# Altium PCB BrewBitTC.PcbDoc
Units mil, origin at the board's own origin, x right, y up, seen from the top; angles counter-clockwise.
Board outline 2381.89 x 3216.54 mil, 2 copper layers (Top Layer, Bottom Layer); 47 components, 88 nets, 272 pads, 186 vias.
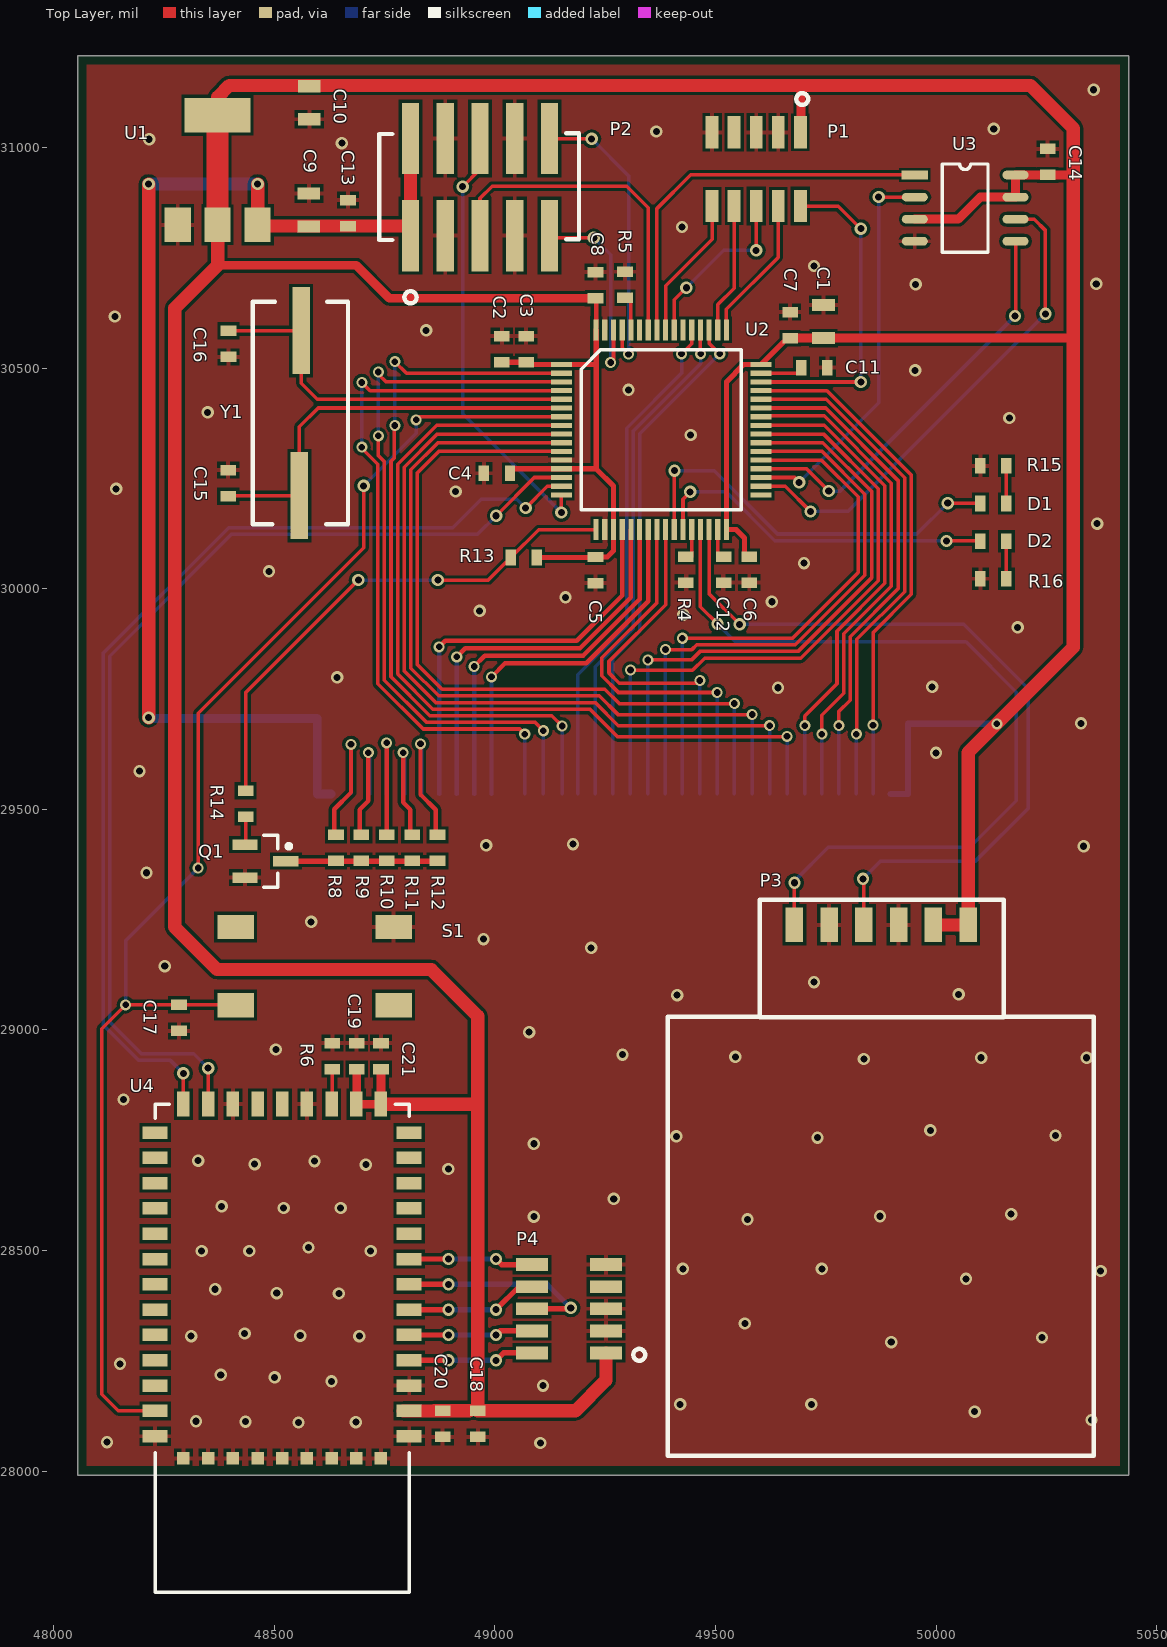
[diagram p0: Top Layer view]
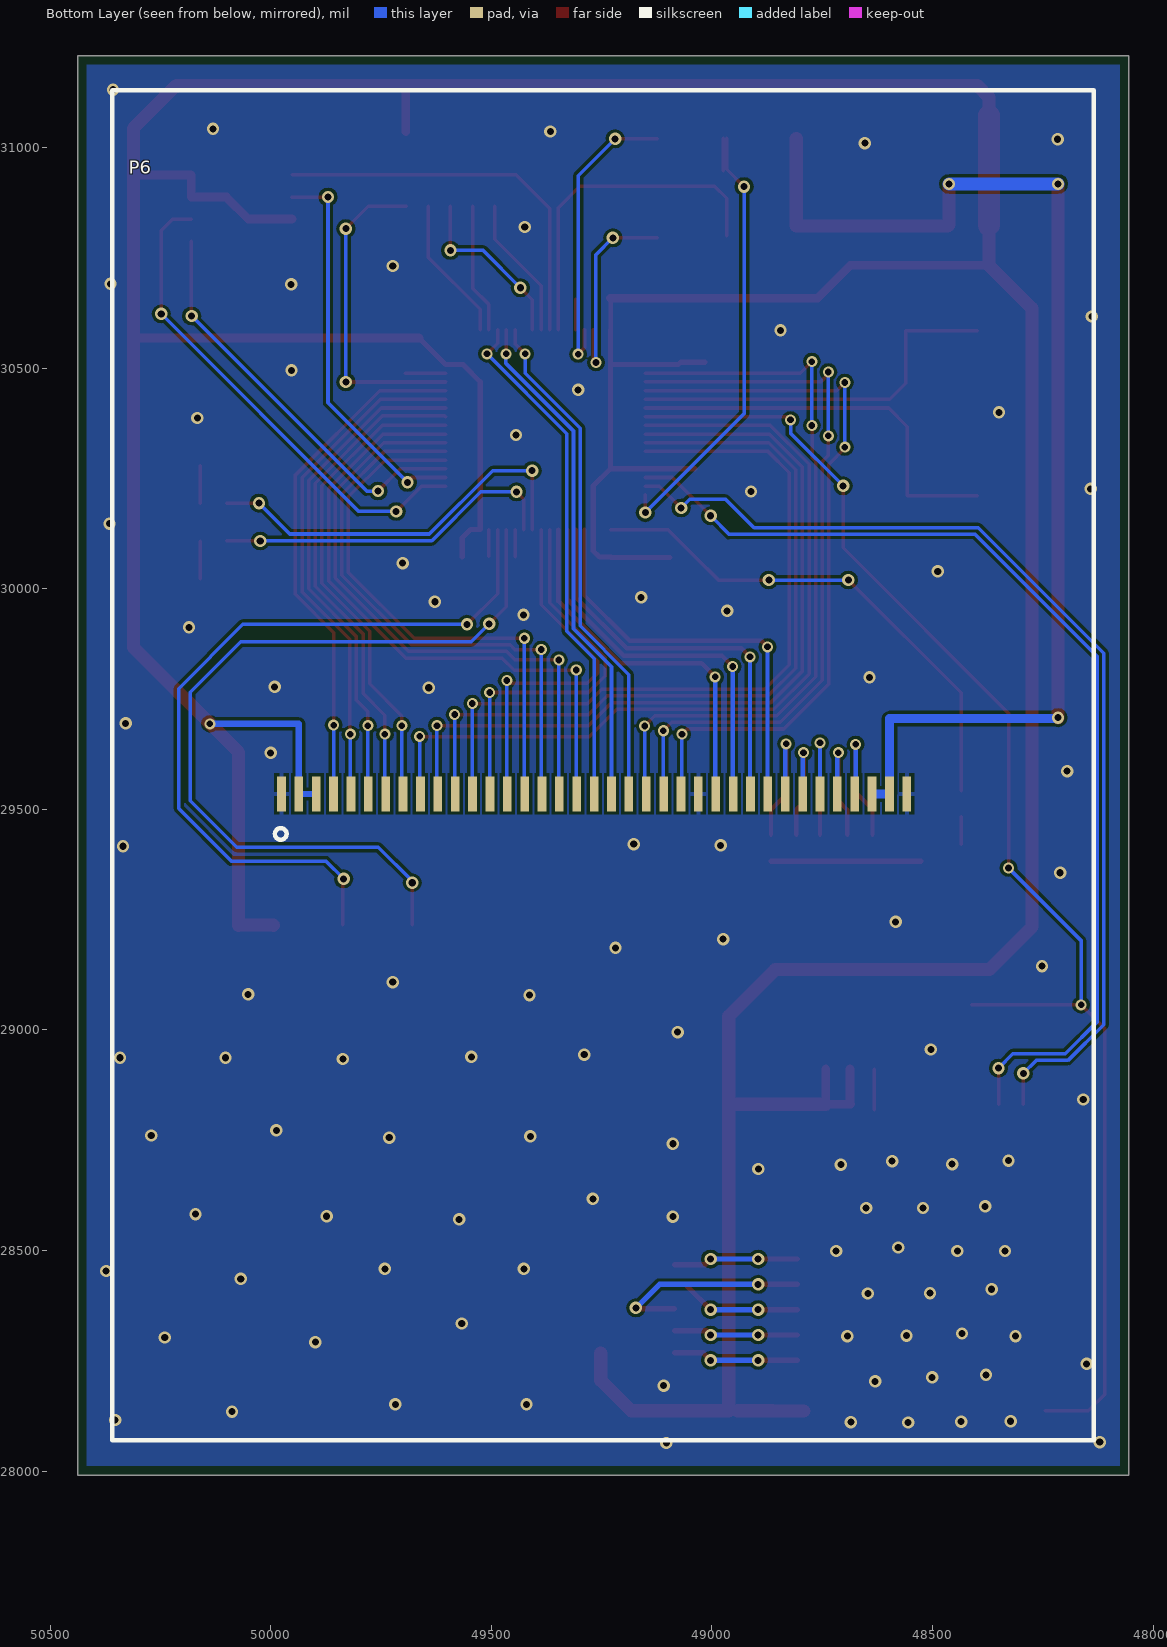
[diagram p1: Bottom Layer view, seen from below]

## Layer stack, top to bottom
Top Layer: signal copper 1.4
Dielectric: dielectric 12.6, FR-4, Dk 4.8
Bottom Layer: signal copper 1.4

## Board outline
48055.12,27991.14 48055.12,31207.68 50437.01,31207.68 50437.01,27991.14

## Design rules (kind name [scope] priority, off if disabled: settings)
Clearance [All] p1: gap=7
HoleSize [All] p1: absolutevalues=TRUE maxlimit=250 minlimit=15 maxpercent=80.000 minpercent=20.000
MinimumAnnularRing [All] p1: minimumring=5
MinimumSolderMaskSliver FinePitchQFP [InComponent('U2') vs InComponent('U2')] p1: minsoldermaskwidth=0
MinimumSolderMaskSliver [All] p2: minsoldermaskwidth=10
PolygonConnect ViaConnect [IsVia] p1: connectstyle=Direct reliefconductorwidth=10 reliefentries=4 polygonreliefangle="90 Angle"
PolygonConnect [All] p2: connectstyle=Relief reliefconductorwidth=10 reliefentries=4 polygonreliefangle="90 Angle"
RoutingVias [All] p1: holewidth=10 width=22 viastyle="Through Hole" minholewidth=10 minwidth=22 maxholewidth=28 maxwidth=50
SilkscreenOverComponentPads [All] p1: minsilkscreentomaskgap=10
SolderMaskExpansion [All] p1: expansion=4
Width [All] p1: maxlimit=50 minlimit=8 preferedwidth=10
25 further rules are at their usual default settings.

## Classes and differential pairs
component class LCD: P6 Q1 R8 R9 R10 R11 R12 R13 R14
component class ISM4319: C18 C19 C20 C21 P4 R6 U4
component class BrewBitTC: C1 C2 C3 C4 C5 C6 C7 C8 C9 C10 C11 C12 C13 C14 C15 C16 C17 D1 D2 P1 P2 P3 R4 R5 R15 R16 S1 U1 U2 U3 Y1

## Components (designator, comment, footprint, x,y, rotation, side; value= is the part's Value field where it differs from the comment)
C1 "Cap" 0805 49745.08,30605.31 r270 top
C2 "Cap" 0603 49015.98,30543.03 r270 top
C3 "Cap" 0603 49070.98,30543.03 r270 top
C4 "Cap" 0603 49004.92,30261.81 r0 top
C5 "Cap" 0603 49228.35,30042.32 r90 top
C6 "Cap" 0603 49576.77,30043.31 r90 top
C7 "Cap" 0603 49669.29,30597.44 r270 top
C8 "Cap" 0603 49228.35,30687.99 r270 top
C9 "Cap" 0805 48578.74,30858.27 r270 top
C10 "Cap" 0805 48579.72,31101.38 r90 top
C11 "Cap" 0603 49724.41,30500.98 r180 top
C12 "Cap" 0603 49518.7,30043.31 r90 top
C13 "Cap" 0603 48667.32,30851.38 r270 top
C14 "Cap" 0603 50252.95,30967.52 r270 top
C15 "Cap" 0603 48395.67,30239.17 r270 top
C16 "Cap" 0603 48396.65,30555.12 r90 top
C17 "Cap" 0603 48284.45,29027.56 r90 top
C18 "Cap" 0603 48961.61,28107.28 r90 top
C19 "Cap" 0603 48687.01,28940.75 r270 top
C20 "Cap" 0603 48881.89,28107.28 r90 top
C21 "Cap" 0603 48742.01,28940.75 r270 top
D1 "LED2" 0603 50129.92,30193.24 r0 top
D2 "LED2" 0603 50129.92,30107.94 r0 top
P1 "MCU JTAG" "5X2 PIN SMT HEADER" 49592.52,31034.45 r270 top
P2 "PWR_BRD" "5X2 PIN SMT HEADER - 2.0MM" 48809.06,30800.2 r90 top
P3 "BB-WS-DB" "6 Pin SMT Header - duplicate" 49679.13,29238.19 r0 top
P4 "ISM JTAG" "5X2 PIN SMT HEADER" 49251.97,28368.11 r180 top
P6 "ER-TFT032-2" ER-TFT032-2 49246.46,29599.84 r180 bottom locked
Q1 "NPN" SOT23_M 48480.2,29382.68 r0 top
R4 "Res2" 0603 49433.07,30043.31 r90 top
R5 "Res2" 0603 49295.28,30688.98 r270 top
R6 "Res2" 0603 48632.01,28940.75 r90 top
R8 "Res2" 0603 48640.08,29412.68 r90 top
R9 "Res2" 0603 48697.58,29412.68 r90 top
R10 "Res2" 0603 48755.08,29412.68 r90 top
R11 "Res2" 0603 48812.58,29412.68 r90 top
R12 "Res2" 0603 48870.08,29412.68 r90 top
R13 "Res2" 0603 49065.94,30070.87 r0 top
R14 "Res2" 0603 48435.2,29512.68 r90 top
R15 "Res2" 0603 50129.92,30278.54 r0 top
R16 "Res2" 0603 50129.92,30022.64 r0 top
S1 "SW-PB" FSM4JSMA 48591.54,29144.69 r270 top
U1 "NCP1117LP" SOT-223 48372.05,30824.8 r0 top
U2 "STM32F205" LQFP64 49150.98,30508.03 r0 top
U3 "M25P80-VMN6TP" SO8N 49951.86,30937.6 r0 top
U4 "ISM43xx" ISM-WIFI 48792.01,28079.25 r180 top
Y1 "XTAL" "HC49SD XTAL" 48560.98,30398.03 r270 top

## Footprints (in the part's own frame and the unit in brackets; to place one, negate y for a bottom-side part, rotate by r counter-clockwise, add the part's x,y. Pads: shape width x height; smd on the part's side, far side on the other; paste and mask are expansions set on the pad)
"5X2 PIN SMT HEADER" [mm]
  rect 1.85x0.74 smd: 1(0,2.54) 2(4.25,2.54) 3(0,1.27) 4(4.25,1.27) 5(0,0) 6(4.25,0) 7(0,-1.27) 8(4.25,-1.27) 9(0,-2.54) 10(4.25,-2.54)
  silkscreen extent -2.26,2.31 -1.58,2.99
"5X2 PIN SMT HEADER - 2.0MM" [mm]
  rect 4.1x1 smd: 1(0,0) 2(5.6,0) 3(0,-2) 4(5.6,-2) 5(0,-4) 6(5.6,-4) 7(0,-6) 8(5.6,-6) 9(0,-8) 10(5.6,-8)
  silkscreen extent -3.9,-9.7 5.9,1.8
"6 Pin SMT Header - duplicate" [mm] "For 3M9355TR-ND"
  rect 1x2 smd: 1(0,0) 2(2,0) 3(4,0) 4(6,0) 5(8,0) 6(10,0)
  silkscreen extent -2,-5.31 12.05,1.45
0603 [mm]
  rect 0.6x0.9 smd: 1(-0.75,0) 2(0.75,0)
0805 [mm]
  rect 0.7x1.3 smd: 1(-0.95,0) 2(0.95,0)
ER-TFT032-2 [mm] "East Rising 3.2\" TFT LCD"
  rect 0.5x2 smd: 1(-18.52,-1.65) 2(-17.52,-1.65) 3(-16.52,-1.65) 4(-15.52,-1.65) 5(-14.52,-1.65) 6(-13.52,-1.65) 7(-12.52,-1.65) 8(-11.52,-1.65) 9(-10.52,-1.65) 10(-9.52,-1.65) 11(-8.52,-1.65) 12(-7.52,-1.65) 13(-6.52,-1.65) 14(-5.52,-1.65) 15(-4.52,-1.65) 16(-3.52,-1.65) 17(-2.52,-1.65) 18(-1.52,-1.65) 19(-0.52,-1.65) 20(0.48,-1.65) 21(1.48,-1.65) 22(2.48,-1.65) 23(3.48,-1.65) 24(4.48,-1.65) 25(5.48,-1.65) 26(6.48,-1.65) 27(7.48,-1.65) 28(8.48,-1.65) 29(9.48,-1.65) 30(10.48,-1.65) 31(11.48,-1.65) 32(12.48,-1.65) 33(13.48,-1.65) 34(14.48,-1.65) 35(15.48,-1.65) 36(16.48,-1.65) 37(17.48,-1.65)
  silkscreen extent -28.25,-38.85 28.25,38.85
FSM4JSMA [mm] "SWITCH TACTILE SPST-NO 0.05A 12V"
  rect 1.4x2.1 smd: 1(-2.25,4.55) 2(2.25,-4.55) ""(-2.25,-4.55) ""(2.25,4.55)
"HC49SD XTAL" [mm] "8 MHz Crystal"
  rect 5x1 smd: 1(-4.75,0) 2(4.75,-0.1)
  silkscreen extent -6.4,-2.78 6.4,2.7
ISM-WIFI [mm]
  rect 1.44x0.72 smd: 1(-0.358,0) 2(-0.358,-1.457) 3(-0.358,-2.914) 4(-0.358,-4.371) 5(-0.358,-5.828) 6(-0.358,-7.285) 7(-0.358,-8.742) 8(-0.358,-10.199) 9(-0.358,-11.656) 10(-0.358,-13.113) 11(-0.358,-14.57) 12(-0.358,-16.027) 13(-0.358,-17.484) 23(14.267,-17.484) 24(14.267,-16.027) 25(14.267,-14.57) 26(14.267,-13.113) 27(14.267,-11.656) 28(14.267,-10.199) 29(14.267,-8.742) 30(14.267,-7.285) 31(14.267,-5.828) 32(14.267,-4.371) 33(14.267,-2.914) 34(14.267,-1.457) 35(14.267,0)
  rect 0.72x1.44 smd: 14(1.269,-19.114) 15(2.691,-19.114) 16(4.112,-19.114) 17(5.533,-19.114) 18(6.954,-19.114) 19(8.375,-19.114) 20(9.796,-19.114) 21(11.217,-19.114) 22(12.638,-19.114)
  rect 0.72x0.72 smd: 36(12.638,1.27) 37(11.217,1.27) 38(9.796,1.27) 39(8.375,1.27) 40(6.954,1.27) 41(5.533,1.27) 42(4.112,1.27) 43(2.691,1.27) 44(1.269,1.27)
  silkscreen extent -0.36,-19.11 14.27,8.98
LQFP64 [mm]
  rect 1.2x0.3 smd: 1(0,0) 2(0,-0.5) 3(0,-1) 4(0,-1.5) 5(0,-2) 6(0,-2.5) 7(0,-3) 8(0,-3.5) 9(0,-4) 10(0,-4.5) 11(0,-5) 12(0,-5.5) 13(0,-6) 14(0,-6.5) 15(0,-7) 16(0,-7.5) 33(11.5,-7.5) 34(11.5,-7) 35(11.5,-6.5) 36(11.5,-6) 37(11.5,-5.5) 38(11.5,-5) 39(11.5,-4.5) 40(11.5,-4) 41(11.5,-3.5) 42(11.5,-3) 43(11.5,-2.5) 44(11.5,-2) 45(11.5,-1.5) 46(11.5,-1) 47(11.5,-0.5) 48(11.5,0)
  rect 0.3x1.2 smd: 17(2,-9.5) 18(2.5,-9.5) 19(3,-9.5) 20(3.5,-9.5) 21(4,-9.5) 22(4.5,-9.5) 23(5,-9.5) 24(5.5,-9.5) 25(6,-9.5) 26(6.5,-9.5) 27(7,-9.5) 28(7.5,-9.5) 29(8,-9.5) 30(8.5,-9.5) 31(9,-9.5) 32(9.5,-9.5) 49(9.5,2) 50(9,2) 51(8.5,2) 52(8,2) 53(7.5,2) 54(7,2) 55(6.5,2) 56(6,2) 57(5.5,2) 58(5,2) 59(4.5,2) 60(4,2) 61(3.5,2) 62(3,2) 63(2.5,2) 64(2,2)
  silkscreen extent 1.14,-8.36 10.36,0.87
SO8N [mm]
  rect 1.5x0.5 smd: 1(0,0)
  oval 1.5x0.5 smd: 2(0,-1.27) 3(0,-2.54) 4(0,-3.81) 5(5.8,-3.81) 6(5.8,-2.54) 7(5.8,-1.27) 8(5.8,0)
  silkscreen extent 1.58,-4.44 4.22,0.64
SOT23_M [mm] "SOT23, 3-Leads, Body 2.9x1.3mm, Pitch 0.95mm, Lead Span 2.3mm - Reverse Pinning, IPC Low Density"
  rect 1.45x0.6 smd: 1(1.175,0) 2(-1.175,-0.95) 3(-1.175,0.95)
  silkscreen extent -0.1,-1.5 1.48,1.5, body extent -0.7,-1.5 0.7,1.5, height 1.1
SOT-223 [mm]
  rect 1.5x2 smd: 1(-2.3,0) 2(0,0) 3(2.3,0)
  rect 3.8x2 smd: 4(0,6.3)

## Part data
C1 C2 C3 C4 C5 C6 C7 C8 C9 C10 C11 C12 C13 C14 C15 C16 C17 C18 C19 C20 C21: "Capacitor"
D1 D2: "Typical RED, GREEN, YELLOW, AMBER GaAs LED"
P1 P2 P4: library part "Header 5X2", "Header, 5-Pin, Dual row"
P3: "BrewBit Wireless Sensor Daughter Board"
P6: "3.2\" TFT LCD module with touch panel"
Q1: "NPN Bipolar Transistor"
R4 R5 R6 R8 R9 R10 R11 R12 R13 R14 R15 R16: "Resistor"
S1: "Switch"
U1: "1.0 A Low-Dropout Positive  Fixed and Adjustable  Voltage Regulators"
U2: library part STM32F20x-LQFP64, "STMicroelectronics STM32F20x LQFP64"
U3: "IC FLASH 8MBIT 75MHZ SO8N"
U4: library part ISM4319, "Inventek Systems WiFi Module"
Y1: "Crystal Oscillator"

## Via types
v1: diameter 28, hole 16, Top Layer to Bottom Layer, 143 vias
v2: diameter 25, hole 15, Top Layer to Bottom Layer, tented bottom, 27 vias
v3: diameter 25, hole 15, Top Layer to Bottom Layer, 10 vias
v4: diameter 25, hole 15, Top Layer to Bottom Layer, tented top, 5 vias
v5: diameter 28, hole 16, Top Layer to Bottom Layer, tented top, 1 vias

## Nets (pads, with @x,y where several pads share a name; then routed paths per layer and width w, separated by ;. In a path a pad name is that pad's centre, name@x,y a point inside that pad or via, vN(x,y) a via of type N, cw(c..) or ccw(c..) an arc to the next point about the centre after c; other vN are vias at no path point)
3V3: C1.2 C2.2 C3.2 C4.2 C5.2 C6.2 C7.2 C8.2 C10.2 C14.2 C18.2 C19.2 C20.2 C21.2 P1.1 P3.5 P3.6 P4.1 P6.2 P6.3 R13.2 U1.2 U1.4 U2.1 U2.13 U2.19 U2.32 U2.48 U2.64 U3.3 U3.7 U3.8 U4.2 U4.14 U4.15 | length 12784.8
  Top Layer w10: C3.2 C3.2@49076.46,30508.03 ; U2.64 C8.2@49229.72,30658.46
  Top Layer w12: C2.2 C3.2 ; C4.2@49038.39,30271.81 U2.13 49229.72,30271.81 ; C3.2@49076.46,30508.03 U2.1 49229.72,30508.03 ; R13.2 C5.2@49228.35,30070.87 ; C5.2 49254.92,30071.85 49269.09,30086.02 U2.19 49269.09,30232.44 49229.72,30271.81 ; U2.64 49229.72,30508.03 ; C6.2@49565.98,30072.56 49565.98,30115.12 49547.09,30134.02 U2.32 49525,30468.9 49564.13,30508.03 U2.48 49662.64,30566.93 C7.2@49669.29,30566.93 ; 49229.72,30271.81 49229.72,30508.03
  Top Layer w20: 48372.05,30733.27 48686.02,30733.27 48760.83,30658.46 C8.2@49229.72,30658.46 ; U1.2@48372.05,30801.18 U1.2@48383.86,30812.99 ; U4.15 U4.15@48687.01,28831.77 ; C19.2 U4.15@48687.01,28831.77 ; U4.14 C21.2 ; U4.14 U4.15@48687.01,28831.77 ; 48941.93,28135.83 48960.63,28135.83 C18.2 ; C7.2@49663.62,30567.91 50307.09,30567.91 ; P1.1@49693.9,31035.83 49693.9,31140.75 ; U3.3 50050.2,30837.6 50100.29,30887.69 50180.12,30887.69 U3.8@50180.12,30937.6 ; U3.8 50310.43,30937.6
  Top Layer w30: U1.2@48372.05,30801.18 48372.05,30733.27 48274.61,30635.83 48274.61,29233.27 48371.06,29136.81 48856.3,29136.81 48961.61,29031.5 C18.2 49183.07,28136.81 49251.97,28205.71 P4.1 ; U1.4 48372.05,31114.17 48398.62,31140.75 49693.9,31140.75 50213.58,31140.75 50311.02,31043.31 50311.02,29867.13 50072.83,29628.94 P3.6@50072.83,29237.2 ; U4.14 48957.68,28831.77 ; U4.2@48792.01,28136.61 48859.84,28136.61 ; 48862.2,28136.81 48941.93,28136.81 ; P3.5@49994.09,29237.2 P3.6
  Top Layer w50: U1.2 U1.4
  Bottom Layer w14: P6.3 P6.2 49936.22,29693.9 v3@50136.81,29693.9
  other v3: 50137.8,29693.9
5V: C9.2 C13.2 P2.1 P2.2 P6.35 P6.36 U1.3 | length 2680.8
  Top Layer w20: v1(48215.55,29707.68) v1@48218.5,29704.72
  Top Layer w30: v1(48215.55,29707.68) v1(48215.55,30917.32) ; U1.3 v1(48462.6,30917.32) ; U1.3@48465.55,30821.85 C13.2 48809.06,30821.85 P2.2
  Bottom Layer w20: v1(48215.55,29707.68) 48217.52,29705.71 48597.64,29705.71 P6.36 P6.35@48628.99,29534.88
  Bottom Layer w30: v1(48215.55,30917.32) v1(48462.6,30917.32)
BL_CNT: R13.1 R14.2 U2.17 | length 1169.6
  Top Layer w8: R14.2 48435.2,29763.94 v1(48690.94,30019.69) ; v1(48871.06,30019.69) 48985.24,30019.69 R13.1 49099.57,30134.02 U2.17
  Bottom Layer w8: v1(48690.94,30019.69) v1(48871.06,30019.69)
BOOT0: R5.2 U2.60 | length 69.2
  Top Layer w8: U2.60 R5.2@49308.46,30655.98
BOOT1: R4.2 U2.28 | length 61.2
  Top Layer w8: R4.2@49446.26,30072.83 U2.28
D0: P6.9 U2.8 | length 1959.8
  Top Layer w8: U2.8 48868.27,30370.24 48779.8,30281.77 48779.8,29806.81 48859.53,29727.09 49215.83,29727.09 49278.07,29664.84 49661.89,29664.84 v2(49662.4,29665.35)
  Bottom Layer w8: P6.9@49662.4,29534.88 v2@49662.4,29670.28
D1: P6.10 U2.9 | length 1883.8
  Top Layer w8: U2.9 48869.8,30350.55 48794.8,30275.56 48794.8,29813.46 48866.18,29742.09 49227.4,29742.09 49279.65,29689.84 v2(49623.11,29689.84)
  Bottom Layer w8: P6.10@49623.11,29534.88 v2(49623.11,29689.84)
D2: P6.11 U2.10 | length 1812.8
  Top Layer w8: U2.10 48871.33,30330.87 48809.8,30269.35 48809.8,29820.12 48872.83,29757.09 49237.01,29757.09 49279.25,29714.84 v2(49583.11,29714.84)
  Bottom Layer w8: P6.11@49583.11,29534.88 v2(49583.11,29714.84)
D3: P6.12 U2.11 | length 1741.1
  Top Layer w8: U2.11 48872.85,30311.18 48824.8,30263.13 48824.8,29827.76 48880.47,29772.09 49249.57,29772.09 49281.81,29739.84 v2(49543.11,29739.84)
  Bottom Layer w8: P6.12@49543.11,29534.88 v2(49543.11,29739.84)
D4: P6.13 U2.24 | length 890.4
  Top Layer w8: U2.24 49367.52,29968.63 49242.13,29843.24 49242.13,29803.15 49280.43,29764.84 v2(49503.94,29764.76)
  Bottom Layer w8: P6.13@49503.94,29534.88 v2(49503.94,29764.76)
D5: P6.14 U2.25 | length 853.7
  Top Layer w8: U2.25 49387.2,29963.98 49258.86,29835.63 49258.86,29809.06 49282.48,29785.43 49458.46,29785.43 v2(49464.96,29791.93)
  Bottom Layer w8: P6.14@49464.96,29534.88 v2(49464.96,29791.93)
D6: P6.15 U2.37 | length 1239.3
  Top Layer w8: v2(49425.2,29887.8) 49674.78,29887.8 49823.9,30036.91 49823.9,30208.17 49740.57,30291.5 U2.37
  Bottom Layer w8: P6.15@49425.2,29534.88 v2(49425.2,29887.8)
D7: P6.16 U2.38 | length 1308.1
  Top Layer w8: v2(49386.81,29862.2) 49446.85,29862.2 49457.44,29872.8 49681,29872.8 49838.9,30030.7 49838.9,30214.38 49742.1,30311.18 U2.38
  Bottom Layer w8: P6.16@49386.81,29534.88 v2(49386.81,29862.2)
D8: P6.17 U2.39 | length 1379.7
  Top Layer w8: v2(49346.85,29838.58) 49445.87,29838.58 49465.08,29857.8 49687.21,29857.8 49853.9,30024.48 49853.9,30220.59 49743.62,30330.87 U2.39
  Bottom Layer w8: P6.17@49346.85,29534.88 v2(49346.85,29838.58)
D9: P6.18 U2.40 | length 1451.6
  Top Layer w8: v2@49307.48,29815.08 49447.96,29815.08 49475.67,29842.8 49693.42,29842.8 49868.9,30018.27 49868.9,30226.81 49745.15,30350.55 U2.40
  Bottom Layer w8: P6.18@49307.48,29534.88 v2(49307.48,29815.94)
D10: P6.19 U2.51 | length 1162.5
  Top Layer w8: U2.51 49485.63,30556.69 v4(49509.84,30532.48)
  Bottom Layer w8: P6.19 49266.93,29841.63 49328.74,29903.44 49328.74,30351.38 v4(49509.84,30532.48)
D11: P6.20 U2.52 | length 1151.1
  Top Layer w8: v4@49465.94,30532.48 U2.52
  Bottom Layer w8: P6.20 49227.56,29823.47 49313.74,29909.65 49313.74,30357.59 49466.77,30510.62 49466.77,30532.24 v4(49466.54,30532.48)
D12: P6.21 U2.53 | length 1158.8
  Top Layer w8: v4(49423.23,30532.48) 49446.26,30555.51 U2.53
  Bottom Layer w8: P6.21 49188.19,29805.31 49298.74,29915.87 49298.74,30363.8 49423.23,30488.29 v4(49423.23,30532.48)
D13: P6.22 U2.2 | length 1694.1
  Top Layer w8: v3@48772.64,30370.08 48772.64,30297 48764.76,30289.13 48764.76,29800.2 48852.87,29712.09 49129.45,29712.09 v2(49152.56,29688.98) ; v3(48773.62,30514.76) 48800.04,30488.35 U2.2
  Bottom Layer w8: v3(48773.62,30370.08) v3(48773.62,30514.76) ; P6.22@49152.56,29534.88 v2(49152.56,29688.98)
D14: P6.23 U2.3 | length 1684.2
  Top Layer w8: v3(48736.22,30346.46) 48736.22,30301.96 48749.76,30288.41 48749.76,29792.56 48845.24,29697.09 49091.3,29697.09 v2(49110.24,29678.15) ; v3@48736.22,30493.11 v3(48736.22,30491.14) 48736.22,30486.22 48753.78,30468.66 U2.3
  Bottom Layer w8: v3(48736.22,30346.46) v3(48736.22,30491.14) ; P6.23@49110.24,29534.88 v2(49110.24,29678.15)
D15: P6.24 U2.4 | length 1670.6
  Top Layer w8: v3@48698.82,30318.15 48734.76,30282.2 48734.76,29784.92 48837.6,29682.09 49056.1,29682.09 v2(49067.91,29670.28) ; v3(48698.82,30467.52) 48717.36,30448.98 U2.4
  Bottom Layer w8: v3(48698.82,30320.87) v3(48698.82,30467.52) ; P6.24@49067.91,29534.88 v2(49067.91,29670.28)
FL_CS: U2.57 U3.1 | length 890.4
  Top Layer w8: U2.57 49367.52,30861.61 49443.9,30937.99 U3.1@49951.47,30937.99
GND: C1.1 C2.1 C3.1 C4.1 C5.1 C6.1 C7.1 C8.1 C9.1 C10.1 C11.1 C12.1 C13.1 C14.1 C15.1 C16.1 C17.1 C18.1 C19.1 C20.1 C21.1 P1.3 P1.5 P1.9 P2.3 P2.4 P2.7 P2.8 P3.2 P3.4 P4.3 P4.5 P4.9 P6.1 P6.25 P6.37 Q1.2 R4.1 R5.1 R6.2 R15.1 R16.1 S1.1 U1.1 U2.12 U2.18 U2.63 U3.4 U4.1 U4.3 U4.17 U4.20 U4.35 U4.36 U4.37 U4.38 U4.39 U4.40 U4.41 U4.42 U4.43 U4.44
  other v1: 49103.35,28063.98 48121.06,28065.94 48555.12,28110.24 48685.04,28111.22 48435.04,28112.2 48322.83,28113.19 50352.36,28116.14 50087.6,28134.84 49420.28,28151.57 49717.52,28151.57 49109.25,28193.9 48629.92,28203.74 48500.98,28212.6 48378.94,28218.5 48150.59,28243.11 49898.62,28292.32 50240.16,28303.15 48312.01,28306.1 48692.91,28306.1 48559.06,28307.09 48433.07,28312.01 49566.93,28334.65 48646.65,28402.56 48505.91,28403.54 48366.14,28412.4 50067.91,28436.02 50373.03,28453.74 49426.18,28458.66 49741.14,28458.66 48335.63,28499.02 48443.9,28499.02 48718.5,28499.02 48577.76,28506.89 49572.83,28570.87 49088.58,28576.77 49873.03,28577.76 50170.28,28582.68 48521.65,28596.46 48650.59,28596.46 48380.91,28600.39 49269.68,28617.13 48894.68,28685.04 48707.68,28694.88 48455.71,28695.87 48591.54,28702.76 48327.76,28703.74 49088.58,28742.13 49731.3,28755.91 49411.42,28758.86 50270.67,28760.83 49987.2,28772.64 48158.46,28842.52 49836.61,28934.06 50102.36,28937.01 50341.54,28937.01 49545.28,28938.98 49289.37,28943.9 48503.94,28955.71 49077.76,28995.08 49413.39,29078.74 50051.18,29080.71 49723.43,29108.27 48251.97,29144.69 49218.5,29186.02 48974.41,29205.71 48583.66,29245.08 48210.63,29356.3 50334.65,29416.34 48980.32,29418.31 49177.17,29421.26 48194.88,29586.61 50000,29627.95 50328.74,29694.88 49641.73,29775.59 49991.14,29777.56 48642.72,29799.21 50185.04,29912.4 49427.17,29940.94 48965.55,29949.8 49627.95,29970.47 49160.43,29980.31 48488.19,30039.37 49700.79,30058.07 50365.16,30147.64 48911.42,30220.47 48141.73,30226.38 49443.9,30348.43 50166.34,30386.81 48349.41,30399.61 49303.15,30450.79 49952.76,30495.08 48844.49,30585.63 48138.78,30617.13 49953.74,30689.96 50363.19,30690.94 49723.43,30731.3 49424.21,30819.88 48653.54,31009.84 48216.54,31018.7 49366.14,31036.42 50130.91,31042.32 50357.28,31130.91
ISM_ADC0: U4.13
ISM_ADC1: U4.12
ISM_ADC2: U4.11
ISM_ADC3: U4.10
ISM_ADC4: U4.9
ISM_CFG0: U4.28
ISM_CFG1: U4.29
ISM_DM: U4.19
ISM_DP: U4.18
ISM_GPIO0: U4.23
ISM_GPIO1: U4.24
ISM_GPIO2: U4.25
ISM_GPIO3: U4.26
ISM_GPIO4: U4.27
ISM_MISO: U4.31
ISM_MOSI: U4.30
ISM_RX: U2.14 U4.21 | length 2368.9
  Top Layer w8: U4.21 v1(48350.39,28913.39) ; v1(49002.95,30165.35) 49089.73,30252.13 U2.14
  Bottom Layer w8: v1(48350.39,28913.39) 48317.91,28945.87 48199.26,28945.87 48127.2,29017.92 48127.2,29847.24 48403,30123.03 48960.63,30123.03 v1(49002.95,30165.35)
ISM_SCK: U4.32
ISM_SSN: U4.33
ISM_TCK: P4.4 U4.5 | length 282.4
  Top Layer w12: U4.5 v1(48895.2,28308.7) ; v1(49002.87,28308.7) 49012.28,28318.11 P4.4
  Bottom Layer w12: v1(48895.2,28308.7) v1(49002.87,28308.7)
ISM_TDI: P4.8 U4.6 | length 270.4
  Top Layer w12: U4.6 v1(48895.2,28366.06) ; v1(49002.87,28366.06) P4.8@49054.92,28418.11
  Bottom Layer w12: v1(48895.2,28366.06) v1(49002.87,28366.06)
ISM_TDO: P4.6 U4.7 | length 476.7
  Top Layer w12: U4.7 v1(48895.2,28423.43) ; P4.6 49170.28,28368.11 v1(49172.24,28370.08)
  Bottom Layer w12: v1(48895.2,28423.43) 49118.9,28423.43 v1(49172.24,28370.08)
ISM_TMS: P4.2 U4.4 | length 285.5
  Top Layer w12: U4.4 v1(48895.2,28251.34) ; v1(49002.87,28251.34) 49019.65,28268.11 P4.2
  Bottom Layer w12: v1(48895.2,28251.34) v1(49002.87,28251.34)
ISM_TRSTN: P4.10 U4.8 | length 283.8
  Top Layer w12: U4.8 v1(48895.2,28480.79) ; v1(49002.87,28480.79) 49015.55,28468.11 P4.10
  Bottom Layer w12: v1(48895.2,28480.79) v1(49002.87,28480.79)
ISM_TX: U2.15 U4.22 | length 2351.1
  Top Layer w8: U4.22@48294.29,28831.95 v1(48294.29,28901.57) ; v1(49069.88,30183.07) 49119.25,30232.44 U2.15
  Bottom Layer w8: v1(48294.29,28901.57) 48265,28930.87 48193.05,28930.87 48112.2,29011.71 48112.2,29853.45 48396.79,30138.03 48904.53,30138.03 48969.25,30202.76 49050.2,30202.76 v1(49069.88,30183.07)
JTCK: P1.4 U2.49 | length 329
  Top Layer w8: U2.49 49525,30633.27 49642.52,30750.79 P1.4
JTDI_MCU: P1.8 U2.50 | length 295.8
  Top Layer w8: U2.50 49505.31,30644.09 49542.52,30681.3 P1.8
JTDO_MCU: P1.6 U2.55 | length 400.5
  Top Layer w8: U2.55 49406.89,30654.92 v1(49434.06,30682.09) ; v1(49592.52,30766.73) P1.6
  Bottom Layer w8: v1(49434.06,30682.09) 49518.7,30766.73 v1(49592.52,30766.73)
JTMS: P1.2 U2.46 | length 736.5
  Top Layer w8: U2.46 49603.9,30468.5 v1@49834.49,30468.5 ; P1.2 49778.54,30867.13 v1(49829.72,30815.94)
  Bottom Layer w8: v1@49829.72,30468.66 v1(49829.72,30815.94)
  other v1: 49829.72,30468.5
LED_GRN: D1.1 U2.26 | length 914.7
  Top Layer w8: U2.26 49406.89,30267.13 v1(49407.48,30267.72) ; v1(50026.57,30193.9) D1.1@50099.74,30193.9
  Bottom Layer w8: v1(49407.48,30267.72) 49497.05,30267.72 49640.75,30124.02 49956.69,30124.02 v1(50026.57,30193.9)
LED_RED: D2.1 U2.27 | length 795.2
  Top Layer w8: U2.27 49426.57,30203.15 v1(49442.91,30219.49) ; v1(50023.62,30108.27) D2.1@50100.07,30108.27
  Bottom Layer w8: v1(49442.91,30219.49) 49524.06,30219.49 49634.53,30109.02 v1@50023.62,30109.02
NetC11_2: C11.2 U2.47 | length 91.1
  Top Layer w8: U2.47 C11.2@49694.88,30488.35
NetC12_2: C12.2 U2.31 | length 60.8
  Top Layer w8: C12.2@49505.31,30073.23 U2.31
NetC15_2: C15.2 U2.6 Y1.2 | length 926.2
  Top Layer w8: C15.2@48398.5,30211.02 Y1.2 48557.05,30367.09 48599.57,30409.61 U2.6
NetC16_2: C16.2 U2.5 Y1.1 | length 887
  Top Layer w8: C16.2@48398.46,30585.04 Y1.1 48560.98,30465.59 48597.28,30429.29 U2.5
NetD1_2: D1.2 R15.2 | length 85.3
  Top Layer w8: D1.2 R15.2
NetD2_2: D2.2 R16.2 | length 85.3
  Top Layer w8: R16.2 D2.2
NetP6_30: P6.30 R12.2 | length 332.3
  Top Layer w10: v2(48831.69,29648.62) 48831.69,29533.46 48866.14,29499.02 R12.2@48866.14,29442.2
  Bottom Layer w10: P6.30 v2@48833.86,29646.46
NetP6_31: P6.31 R11.2 | length 284.2
  Top Layer w10: v2(48792.32,29628.35) 48792.32,29515.75 48808.64,29499.43 R11.2@48808.64,29442.2
  Bottom Layer w10: P6.31 v2@48794.49,29626.18
NetP6_32: P6.32 R10.2 | length 321
  Top Layer w10: R10.2 v2@48755.08,29647.4
  Bottom Layer w10: v2(48754.92,29650.59) 48755.12,29650.39 P6.32
NetP6_33: P6.33 R9.2 | length 285.7
  Top Layer w10: R9.2@48693.64,29442.2 48693.64,29499.35 48713.58,29519.29 v2(48713.58,29628.35)
  Bottom Layer w10: P6.33 v2@48715.75,29626.18
NetP6_34: P6.34 R8.2 | length 331.4
  Top Layer w10: R8.2@48636.14,29442.2 48636.14,29500.31 48674.21,29538.39 v2(48674.21,29647.44)
  Bottom Layer w10: P6.34@48674.21,29537.05 v2(48674.21,29647.44)
NetQ1_1: Q1.1 R8.1 R9.1 R10.1 R11.1 R12.1 | length 339.7
  Top Layer w12: Q1.1 R12.1@48866.14,29382.68
NetQ1_2: Q1.3 R14.1 | length 61.8
  Top Layer w8: Q1.3@48435.2,29421.34 R14.1
NetR6_1: R6.1 U4.16 | length 91.8
  Top Layer w8: U4.16@48632.01,28819.46 R6.1
NJTRST: P1.10 U2.56 | length 324
  Top Layer w8: U2.56 49387.2,30686.42 49492.52,30791.73 P1.10
RELAY1: P2.10 U2.61 | length 679.5
  Top Layer w8: P2.10@49124.02,31019.69 v1(49219.49,31019.69) ; U2.61 49288.78,30545.87 v4(49303.15,30531.5)
  Bottom Layer w8: v1(49219.49,31019.69) 49303.15,30936.02 v4(49303.15,30531.5)
RELAY2: P2.9 U2.62 | length 475.4
  Top Layer w8: P2.9@49124.02,30795.28 v1(49224.41,30795.28) ; v4(49262.8,30512.8) 49269.09,30519.09 U2.62
  Bottom Layer w8: v1(49224.41,30795.28) 49262.8,30756.89 v4(49262.8,30512.8)
RESET: C17.2 S1.2 U2.7 U4.34 | length 3234.7
  Top Layer w8: U4.34@48244.49,28136.61 48146.85,28136.61 48109.25,28174.21 48109.25,29002.95 v3(48163.39,29057.09) C17.2 S1.2@48411.42,29057.09 ; v3(48327.76,29367.13) 48327.76,29717.52 48702.76,30092.52 v1(48702.76,30233.27) ; v3(48821.85,30382.87) 48828.9,30389.92 U2.7
  Bottom Layer w8: v3(48163.39,29057.09) 48163.39,29202.76 v3(48327.76,29367.13) ; v1(48702.76,30233.27) 48821.85,30352.36 v3(48821.85,30382.87)
SPI1_MISO: U2.35 U3.2 | length 896.6
  Top Layer w8: U2.35 49679.96,30252.13 49690.94,30241.14 v1(49689.96,30241.14) ; v1@49870.28,30887.6 U3.2
  Bottom Layer w8: v1@49690.94,30241.14 v1(49689.96,30241.14) 49870.08,30421.26 v1(49870.08,30887.8)
SPI1_MOSI: U2.36 U3.5 | length 929
  Top Layer w8: U2.36 49706.54,30271.81 v1(49756.89,30221.46) ; v1@50180.21,30619.18 U3.5
  Bottom Layer w8: v1(49756.89,30221.46) 49782.48,30221.46 v1(50179.13,30618.11)
SPI1_SCK: U2.34 U3.6 | length 1120.9
  Top Layer w8: U2.34 49658.31,30232.44 v1(49715.61,30175.14) ; U3.6 50222.44,30837.6 50248.03,30812.01 v1(50248.03,30623.03)
  Bottom Layer w8: v1(49715.61,30175.14) 49800.14,30175.14 v1(50248.03,30623.03)
TFT_CS: P6.4 U2.45 | length 1178
  Top Layer w8: U2.45 49752.79,30448.98 49943.9,30257.87 49943.9,29987.2 49857.28,29900.59 v2(49857.28,29690.94)
  Bottom Layer w8: P6.4@49857.28,29535.08 v2(49857.28,29690.94)
TFT_RD: P6.7 U2.42 | length 1128.7
  Top Layer w8: U2.42 49605.51,30391.69 49746.44,30391.69 49898.9,30239.23 49898.9,30005.84 49790.63,29897.58 49790.63,29763.07 49741.14,29713.58 v2(49741.14,29670.28)
  Bottom Layer w8: P6.7@49741.14,29534.88 v2(49741.14,29670.28)
TFT_RS: P6.5 U2.44 | length 1160.4
  Top Layer w8: U2.44 49751.27,30429.29 49928.9,30251.66 49928.9,29993.42 49820.63,29885.15 v2@49820.63,29670.28
  Bottom Layer w8: P6.5@49819.29,29534.88 v2(49819.29,29670.28)
TFT_RST: P6.8 U2.41 | length 1110.2
  Top Layer w8: U2.41 49746.68,30370.24 49883.9,30233.02 49883.9,30012.06 49775.63,29903.79 49775.63,29784.37 49702.76,29711.5 v2(49702.76,29689.84)
  Bottom Layer w8: P6.8@49702.76,29534.88 v2(49702.76,29689.84)
TFT_WR: P6.6 U2.43 | length 1144.2
  Top Layer w8: U2.43 49749.74,30409.61 49913.9,30245.45 49913.9,29999.63 49805.63,29891.36 49805.63,29747.56 49779.92,29721.85 v2(49779.92,29689.84)
  Bottom Layer w8: P6.6@49779.92,29534.88 v2(49779.92,29689.84)
USART1_TX: P2.5 U2.58 | length 774.5
  Top Layer w8: P2.5 48966.54,30884.84 48994.09,30912.4 49299.21,30912.4 49347.83,30863.78 U2.58
USART2_TX: P2.6 U2.16 | length 1070
  Top Layer w8: v1(48927.17,30911.42) 48966.54,30950.79 P2.6 ; P2.6@48974.41,30947.83 P2.6@48974.41,31020.67 ; v5(49150.98,30172.64) U2.16
  Bottom Layer w8: v1(48927.17,30911.42) 48927.17,30396.46 v5(49150.98,30172.64)
USART3_RX: P3.3 U2.30 | length 1771.5
  Top Layer w8: U2.30 49485.63,29988.78 v1(49555.12,29919.29) ; P3.3 v1@49836.61,29340.55
  Bottom Layer w8: v1(49555.12,29919.29) 50062.99,29919.29 50208.66,29773.62 50208.66,29501.97 50089.57,29382.87 49875,29382.87 v1(49834.65,29342.52)
USART3_TX: P3.1 U2.29 | length 1894.9
  Top Layer w8: U2.29 49465.94,29959.25 v1(49504.92,29920.28) ; P3.1 v1(49679.13,29333.66)
  Bottom Layer w8: v1(49504.92,29920.28) 49545.28,29879.92 50067.91,29879.92 50182.09,29765.75 50182.09,29519.69 50076.77,29414.37 49755.91,29414.37 49679.13,29337.6 v1(49679.13,29333.66)
X+: P6.29 U2.20 | length 945.6
  Top Layer w10: v2(48874.02,29868.11) 48887.8,29881.89 49186.02,29881.89 49288.78,29984.65 U2.20
  Bottom Layer w10: P6.29@48874.02,29534.88 v2(48874.02,29868.11)
X-: P6.27 U2.22 | length 885
  Top Layer w10: v2(48953.15,29823.82) 48977.22,29847.89 49200.11,29847.89 49328.15,29975.93 U2.22
  Bottom Layer w10: P6.27@48953.15,29534.88 v2(48953.15,29823.82)
Y+: P6.28 U2.21 | length 914.8
  Top Layer w10: v2(48913.78,29845.47) 48933.2,29864.89 49193.07,29864.89 49308.46,29980.29 U2.21
  Bottom Layer w10: P6.28@48913.78,29534.88 v2(48913.78,29845.47)
Y-: P6.26 U2.23 | length 854.1
  Top Layer w10: v2(48992.52,29800.2) 49023.21,29830.89 49207.15,29830.89 49347.83,29971.58 U2.23
  Bottom Layer w10: P6.26@48992.52,29534.88 v2(48992.52,29800.2)
pads on no net: P1.7 P4.7 S1. U2.33 U2.54 U2.59

## Polygon pours and split planes (outlines as drawn)
GND on Top Layer "Bottom Layer-No Net 1" (solid, remove dead copper, pour order 4): 48075.79,31187.01 50416.34,31187.01 50416.34,28011.81 48075.79,28011.81
GND on Bottom Layer "Bottom Layer-No Net 1" (solid, remove dead copper, pour order 6): 48075.79,31187.01 48075.79,28011.81 50416.34,28011.81 50416.34,31187.01

## Silkscreen, mask and mechanical layers (free items; w line width, h text height)
Top Overlay:
  lines w10: 49602.36,29029.53 49391.73,29029.53 49391.73,28035.43 50357.28,28035.43 50357.28,29029.53 50152.56,29029.53
Mechanical 1:
  the board outline again, w10